# Altium PCB PCB_Automation System_3_2021-06-15.pcbdoc
Units mm, origin at the board's own origin, x right, y up, seen from the top; angles counter-clockwise.
Board outline 140.08 x 95.5 mm, 2 copper layers (Top Layer, Bottom Layer); 24 components, 25 nets, 101 pads, 10 vias.
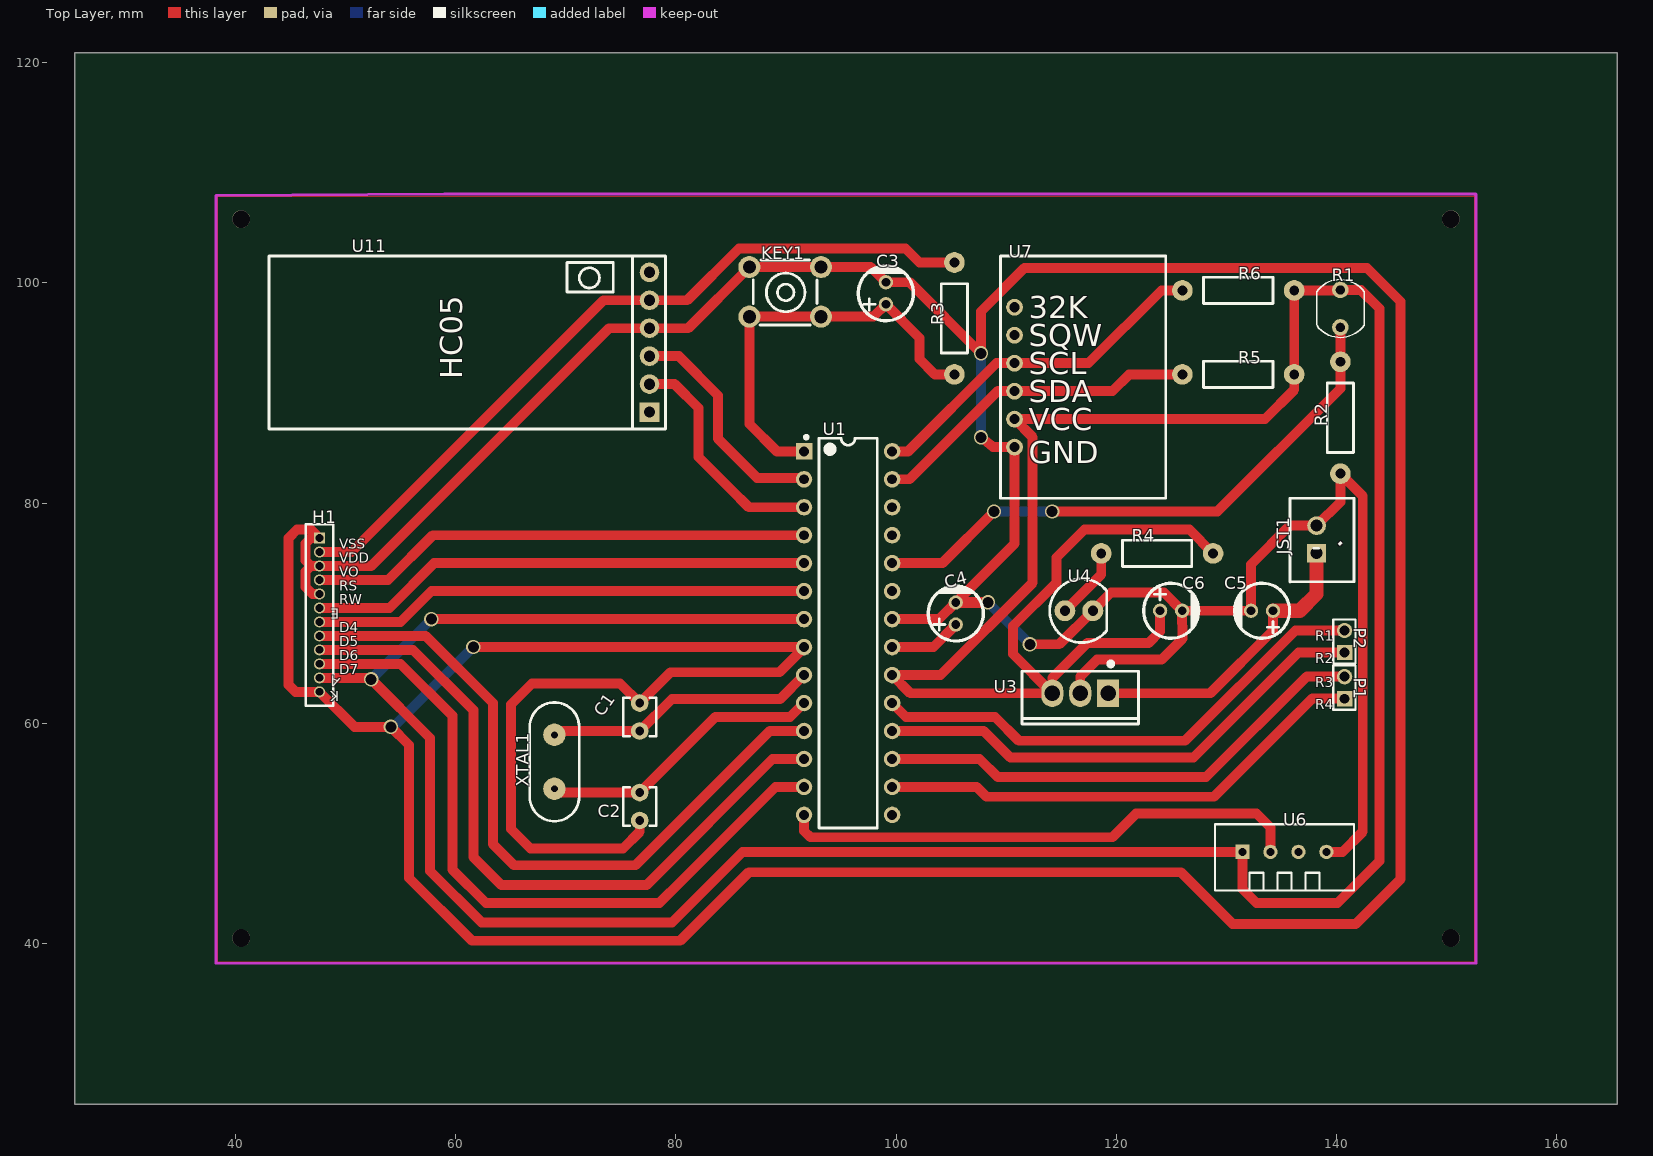
[diagram p0: Top Layer view]
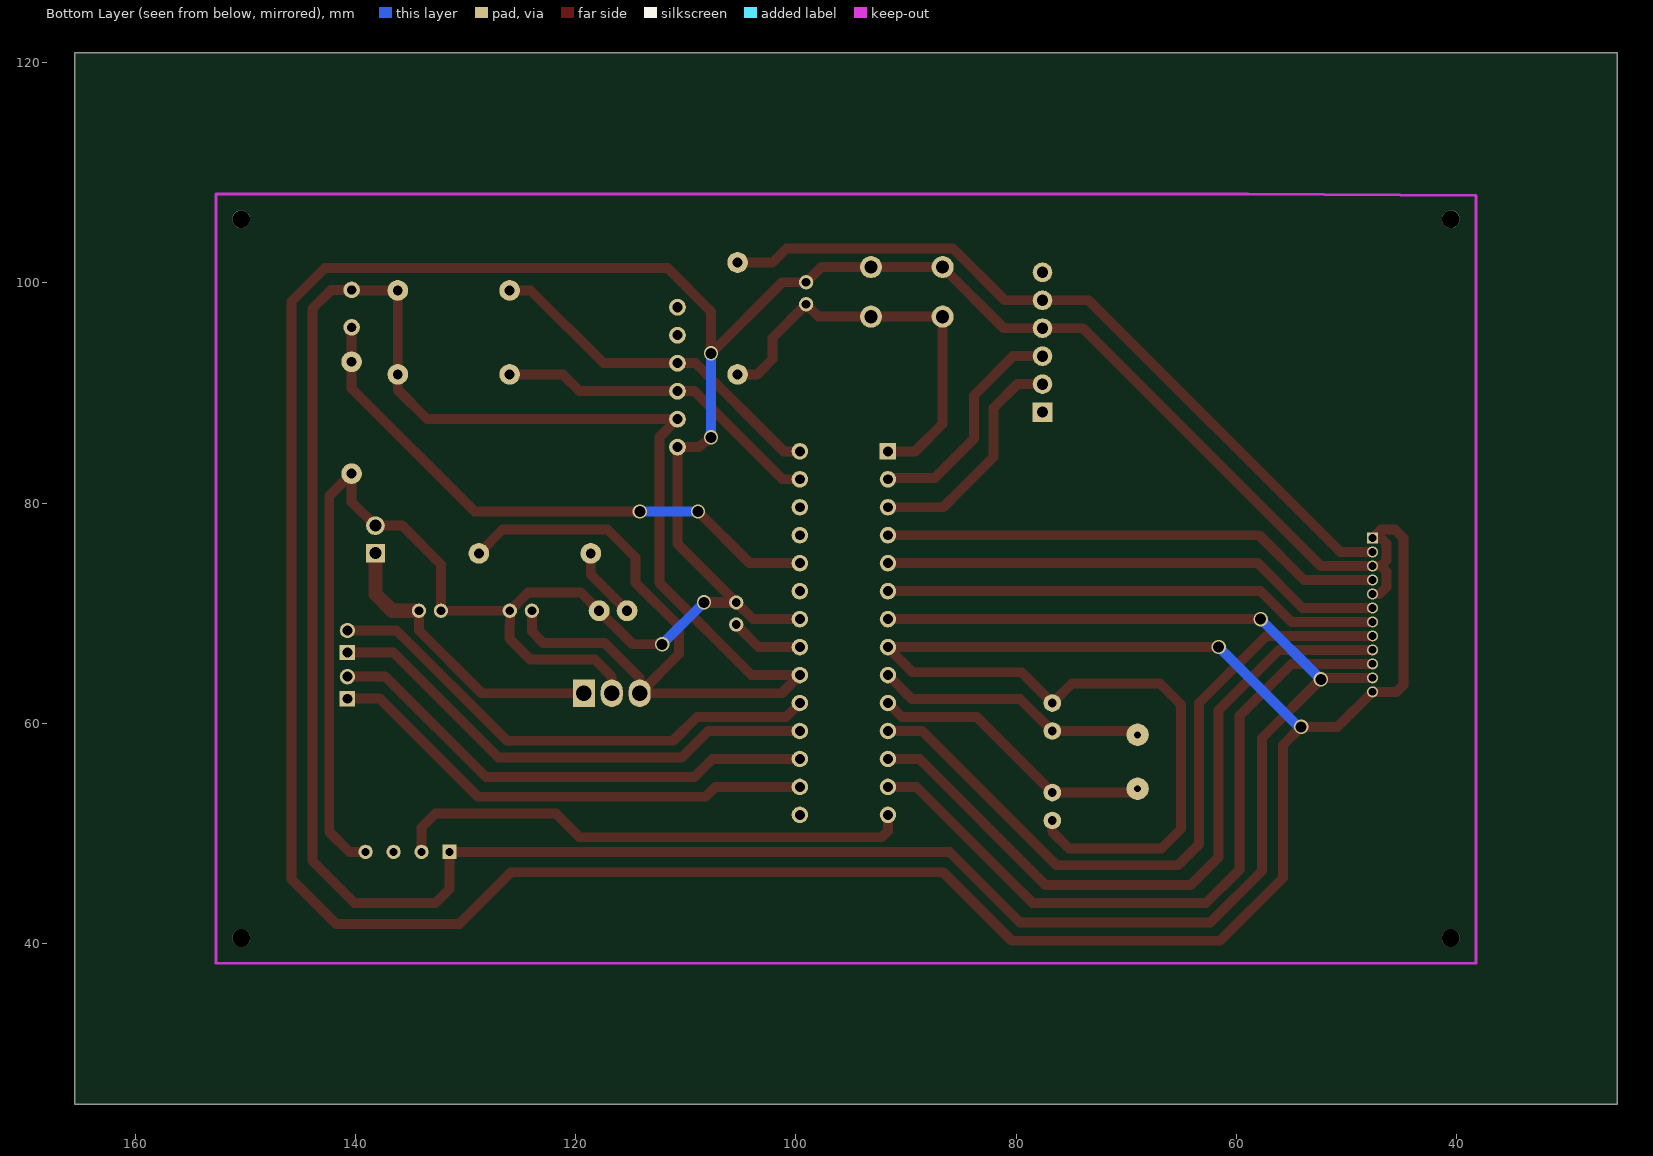
[diagram p1: Bottom Layer view, seen from below]

## Layer stack, top to bottom
Top Layer: signal copper (thickness not stored)
Dielectric: dielectric 0.32, FR-4, Dk 4.8
Bottom Layer: signal copper (thickness not stored)

## Board outline
165.481,25.4 25.4,25.4 25.4,120.904 165.481,120.904

## Components (designator, comment, footprint, x,y, rotation, side; value= is the part's Value field where it differs from the comment)
C1 "22pF" CAP-TH_L3.5-W3.0-P2.54-D0.8 76.708,60.579 r270 top
C2 "22pF" CAP-TH_L3.5-W3.0-P2.54-D0.8 76.708,52.451 r90 top
C3 "100nF" CAP-TH_BD5.0-P2.00-D0.8-FD 99.06,99.06 r90 top
C4 "100nF" CAP-TH_BD5.0-P2.00-D0.8-FD 105.41,69.977 r90 top
C5 "330nF" CAP-TH_BD5.0-P2.00-D0.8-FD 133.223,70.231 r180 top
C6 "100nF" CAP-TH_BD5.0-P2.00-D0.8-FD 124.968,70.231 r0 top
H1 "Female headers 1*12" HDR-TH_12P-P1.27-V 47.625,69.85 r270 top
JST1 "POWER" CONN-TH_XHB-2A 138.176,76.708 r270 top
KEY1 "RST_BTN" KEY-TH_4P-L6.0-W6.0-P4.50 89.916,99.187 r180 top
P1 "Female header1*2P" HDR-TH_2P-P2.00-V 140.716,63.246 r90 top
P2 "Female header1*2P" HDR-TH_2P-P2.00-V 140.716,67.437 r90 top
R1 "LDR07" RESISTOR_LDR_5.1X4.3_RM3.4 140.335,97.663 r270 top
R2 "10k" AXIAL-0.4 140.335,87.757 r90 top
R3 "10K" AXIAL-0.4 105.283,96.774 r90 top
R4 "330Ω" AXIAL-0.4 123.698,75.438 r180 top
R5 "10K" AXIAL-0.4 131.064,91.694 r0 top
R6 "10K" AXIAL-0.4 131.064,99.314 r0 top
U1 "ATMEGA _328P-PU" DIP-28_L34.6-W7.3-P2.54-LS10.2-BL 95.631,68.199 r270 top
U3 "7805_Regulator" TO-220-3_L10.0-W4.5-P2.54-L 116.713,62.738 r180 top
U4 "LED" "5MM LED" 115.316,70.231 r0 top
U6 "DHT11" SENSOR-TH_DHT11 135.255,48.133 r0 top
U7 "RTC_D3231" D3231 110.744,91.44 r90 top
U11 "HC05" HC05 77.597,88.265 r90 top
XTAL1 "16MHz" "16MHZ_OSC [PCB]" 68.961,56.515 r0 top

## Footprints (in the part's own frame and the unit in brackets; to place one, negate y for a bottom-side part, rotate by r counter-clockwise, add the part's x,y. Pads: shape width x height; smd on the part's side, far side on the other; paste and mask are expansions set on the pad)
"5MM LED" [mm]
  round 1.9 hole 0.914: 1(0,0) 2(2.54,0)
  silkscreen extent -1.37,-2.9 3.81,2.9
"16MHZ_OSC [PCB]" [mil]
  round 80 hole 25: 1(0,96.46) 2(0,-96.46)
  silkscreen extent -88,-212 88,212
AXIAL-0.4 [mil]
  round 74 hole 35.4: 1(-200,0) 2(200,0)
  silkscreen extent -124,-47 124,47
CAP-TH_BD5.0-P2.00-D0.8-FD [mm]
  round 1.3 hole 0.8: 1(-1,0) 2(1,0)
  silkscreen extent -2.5,-2.5 2.5,2.5
CAP-TH_L3.5-W3.0-P2.54-D0.8 [mm]
  round 1.6 hole 0.8: 1(-1.27,0) 2(1.27,0)
  silkscreen extent -1.75,-1.5 1.75,1.5
CONN-TH_XHB-2A [mm]
  rect 1.7x1.7 hole 1.1: 1(1.251,0)
  round 1.7 hole 1.1: 2(-1.251,0)
  silkscreen extent -3.75,-2.42 3.86,3.4
D3231 [mil]
  round 60 hole 36: 1(-249.92,-0.06) 2(-149.92,-0.06) 3(-49.92,-0.06) 4(50.08,-0.06) 5(150.08,-0.06) 6(250.08,-0.06)
  silkscreen extent -433,-541 433,50
DIP-28_L34.6-W7.3-P2.54-LS10.2-BL [mm]
  rect 1.5x1.5 hole 0.9: 1(-16.51,-4)
  round 1.5 hole 0.9: 2(-13.97,-4) 3(-11.43,-4) 4(-8.89,-4) 5(-6.35,-4) 6(-3.81,-4) 7(-1.27,-4) 8(1.27,-4) 9(3.81,-4) 10(6.35,-4) 11(8.89,-4) 12(11.43,-4) 13(13.97,-4) 14(16.51,-4) 15(16.51,4) 16(13.97,4) 17(11.43,4) 18(8.89,4) 19(6.35,4) 20(3.81,4) 21(1.27,4) 22(-1.27,4) 23(-3.81,4) 24(-6.35,4) 25(-8.89,4) 26(-11.43,4) 27(-13.97,4) 28(-16.51,4)
  silkscreen extent -17.94,-3.95 17.7,2.65
HC05 [mil]
  rect 70x70 hole 40: 1(0,0)
  round 70 hole 40: 2(100,0) 3(200,0) 4(300,0) 5(400,0) 6(500,0)
  silkscreen extent -60,-57 558,1360
HDR-TH_2P-P2.00-V [mm]
  rect 1.4x1.4 hole 0.889: 1(-1,0)
  round 1.4 hole 0.889: 2(1,0)
  silkscreen extent -2,-1 2.01,1.03
HDR-TH_12P-P1.27-V [mm]
  rect 1x1 hole 0.7: 1(-6.985,0)
  round 1 hole 0.7: 2(-5.715,0) 3(-4.445,0) 4(-3.175,0) 5(-1.905,0) 6(-0.635,0) 7(0.635,0) 8(1.905,0) 9(3.175,0) 10(4.445,0) 11(5.715,0) 12(6.985,0)
  silkscreen extent -8.24,-1.25 8.25,1.25
KEY-TH_4P-L6.0-W6.0-P4.50 [mm]
  round 2 hole 1.2: 1(-3.25,-2.25) 2(3.25,-2.25) 3(3.25,2.25) 4(-3.25,2.25)
  silkscreen extent -2.9,-2.9 2.9,3
RESISTOR_LDR_5.1X4.3_RM3.4 [mm]
  round 1.5 hole 0.8 slot 0.805 at 0 deg: 1(-1.7,0) 2(1.701,0)
  silkscreen extent -2.65,-2.15 2.62,2.17
SENSOR-TH_DHT11 [mil]
  rect 51x51 hole 28: 1(-150,7.89)
  round 51 hole 28: 2(-50,7.89) 3(50,7.89) 4(150,7.89)
  silkscreen extent -248,-130 248,106
TO-220-3_L10.0-W4.5-P2.54-L [mm]
  rect 2x2.5 hole 1.4: 1(-2.54,0)
  oval 2x2.5 hole 1.4: 2(0,0) 3(2.54,0)
  silkscreen extent -5.3,-2.86 5.3,2.8

## Free pads (board coordinates)
  round 1.6 hole 1.6: 1(150.368,105.791) 2(150.368,40.513) 3(40.513,40.513) 4(40.513,105.791)

## Via types
v1: diameter 1.3, hole 1, Top Layer to Bottom Layer, 10 vias

## Nets (pads, with @x,y where several pads share a name; then routed paths per layer and width w, separated by ;. In a path a pad name is that pad's centre, name@x,y a point inside that pad or via, vN(x,y) a via of type N, cw(c..) or ccw(c..) an arc to the next point about the centre after c; other vN are vias at no path point)
+5V: C6.1 H1.2 H1.11 R1.1 R3.2 R4.1 R5.2 R6.2 U1.7 U1.20 U3.3 U6.1 U7.2 U11.5 | length 419.5
  Top Layer w0.9: H1.11 52.324,64.135 v1(52.324,64.008) 57.658,58.674 57.658,46.609 62.357,41.91 79.629,41.91 86.053,48.334 U6.1 131.445,44.958 132.715,43.688 140.081,43.688 143.891,47.498 143.891,97.663 142.192,99.362 R1.1 ; H1.2 50.546,75.565 73.406,98.425 U11.5 81.026,98.425 85.725,103.124 100.838,103.124 102.108,101.854 R3.2 ; v1(57.785,69.469) 76.698,69.469 U1.7 ; U7.2 133.479,87.632 136.144,90.297 R5.2 R6.2 140.335,99.314 R1.1 ; U7.2 112.395,85.982 112.395,72.771 104.013,64.389 U1.20 101.282,62.738 U3.3 ; C6.1 123.967,68.341 122.936,67.31 117.348,67.31 114.173,64.135 U3.3 ; R4.1 126.619,77.597 117.094,77.597 114.554,75.057 114.554,72.771 110.617,68.834 110.617,66.294 U3.3
  Bottom Layer w0.9: v1(52.324,64.008) v1(57.785,69.469)
D4: H1.7 U1.6 | length 45.2
  Top Layer w0.9: H1.7 54.991,69.215 57.785,72.009 77.432,72.009 U1.6
D5: H1.8 U1.11 | length 65.2
  Top Layer w0.9: H1.8 57.277,67.945 63.373,61.849 63.373,49.022 65.278,47.117 70.693,47.117 76.327,47.117 88.519,59.309 U1.11
D6: H1.9 U1.12 | length 65.4
  Top Layer w0.9: H1.9 56.134,66.675 61.595,61.214 61.595,47.879 64.135,45.339 72.156,45.339 77.343,45.339 88.773,56.769 U1.12
D7: H1.10 U1.13 | length 65.6
  Top Layer w0.9: H1.10 54.991,65.405 59.69,60.706 59.69,46.736 62.738,43.688 78.486,43.688 80.546,45.748 89.027,54.229 U1.13
DATA: U1.14 U6.2 | length 47.7
  Top Layer w0.9: U1.14 91.63,50.228 92.202,49.657 119.634,49.657 121.793,51.816 132.715,51.816 133.985,50.546 U6.2
ENABLE: H1.6 U1.5 | length 45.7
  Top Layer w0.9: H1.6 53.975,70.485 58.039,74.549 U1.5
GND: C1.1 C2.1 C3.2 C4.2 C5.2 C6.2 H1.1 H1.3 H1.5 H1.12 JST1.2 KEY1.1 KEY1.2 R2.1 U1.8 U1.22 U3.2 U4.2 U6.4 U7.1 U11.4 | length 551.6
  Top Layer w0.9: H1.5 46.99,71.755 46.355,72.39 46.355,73.787 46.863,74.295 ; v1(61.595,66.929) 76.154,66.929 81.11,66.929 U1.8 91.63,66.865 89.408,64.643 86.444,64.643 79.502,64.643 C1.1 74.93,63.627 66.929,63.627 65.024,61.722 65.024,50.419 66.802,48.641 74.503,48.641 75.184,48.641 76.708,50.165 C2.1 ; C3.2 97.683,101.437 KEY1.1 KEY1.2 81.114,95.885 U11.4 73.914,95.885 63.231,85.202 52.324,74.295 H1.3 ; C3.2 101.234,100.061 v1(107.696,93.599) 107.696,97.409 111.633,101.346 142.748,101.346 145.796,98.298 145.796,45.847 141.732,41.783 130.556,41.783 125.857,46.482 86.614,46.482 80.391,40.259 61.468,40.259 55.753,45.974 55.753,58.039 v1(54.102,59.69) 52.299,59.69 50.8,59.69 H1.12 45.466,62.865 44.831,63.5 44.831,76.835 45.593,77.597 46.863,77.597 H1.1 46.863,76.835 46.355,76.327 46.355,74.803 46.863,74.295 ; U1.22 103.901,69.469 C4.2 110.747,76.312 U7.1 108.806,85.093 v1(107.696,85.979) ; v1(112.141,67.183) 114.808,67.183 U4.2 119.507,71.882 124.318,71.882 C6.2 125.984,67.691 124.079,65.786 118.237,65.786 116.713,64.262 U3.2 ; C6.2 C5.2 ; C5.2 132.222,74.437 135.743,77.96 JST1.2@138.176,77.96 ; JST1.2 140.335,80.118 R2.1 142.367,80.645 142.367,50.165 140.535,48.333 U6.4 ; 46.863,74.295 H1.3 ; 46.863,74.295 H1.3
  Top Layer w1: C4.2 v1(108.331,70.993)
  Bottom Layer w0.9: v1(54.102,59.69) 54.356,59.69 v1(61.595,66.929) ; v1(107.696,85.979) v1(107.696,93.599) ; v1(108.331,70.993) v1(112.141,67.183)
RELAY1: P1.1 U1.16 | length 45.1
  Top Layer w0.9: U1.16 107.315,54.229 108.204,53.34 128.872,53.34 137.78,62.245 P1.1
RELAY2: P1.2 U1.17 | length 45.6
  Top Layer w0.9: U1.17 107.569,56.769 109.22,55.118 128.143,55.118 137.287,64.262 P1.2
RELAY3: P2.1 U1.18 | length 46
  Top Layer w0.9: U1.18 107.95,59.309 110.363,56.896 127,56.896 136.54,66.436 P2.1
RELAY4: P2.2 U1.19 | length 46.7
  Top Layer w0.9: U1.19 100.901,60.579 108.966,60.579 111.125,58.42 126.238,58.42 136.256,68.438 P2.2
RS: H1.4 U1.4 | length 45.7
  Top Layer w0.9: H1.4 53.848,73.025 57.912,77.089 69.113,77.089 U1.4
RX: U1.3 U11.2 | length 21.3
  Top Layer w0.9: U11.2 79.883,90.805 82.042,88.646 82.042,84.201 84.945,81.298 86.614,79.629 U1.3
S$68: 
SCL: R6.1 U1.28 U7.4 | length 32.4
  Top Layer w0.9: U1.28 101.092,84.709 109.096,92.713 U7.4 117.478,92.713 124.079,99.314 R6.1
SDA: R5.1 U1.27 U7.3 | length 30.3
  Top Layer w0.9: U1.27 101.219,82.169 109.223,90.173 U7.3 ; U7.3 119.636,90.172 121.158,91.694 R5.1
TX: U1.2 U11.3 | length 21
  Top Layer w0.9: U11.3 80.264,93.345 83.82,89.789 83.82,85.852 87.376,82.296 91.504,82.296 U1.2
U1_1: C3.1 KEY1.3 KEY1.4 R3.1 U1.1 | length 38.6
  Top Layer w0.9: KEY1.3 KEY1.4 97.937,96.937 C3.1 ; KEY1.3@86.667,96.937 86.667,91.082 86.667,87.196 89.154,84.709 U1.1 ; C3.1 102.108,94.996 102.108,93.091 103.505,91.694 R3.1
U1_9: C1.2 U1.9 XTAL1.1 | length 24.9
  Top Layer w0.9: XTAL1.1 69.305,59.309 C1.2 79.629,62.23 86.063,62.23 89.471,62.23 U1.9
U1_10: C2.2 U1.10 XTAL1.2 | length 26.2
  Top Layer w0.9: XTAL1.2 69.305,53.721 C2.2 83.566,60.579 86.063,60.579 90.361,60.579 U1.10
U1_21: C4.1 U1.21 | length 6.6
  Top Layer w0.9: U1.21 103.378,66.929 105.41,68.961 C4.1
U1_24: R1.2 R2.2 U1.24 | length 52.8
  Top Layer w0.9: U1.24 104.187,74.549 v1(108.886,79.248) ; v1(114.169,79.248) 129.159,79.248 140.335,90.424 R2.2 R1.2@140.335,95.963
  Bottom Layer w0.9: v1(108.886,79.248) v1(114.169,79.248)
U4_1: R4.2 U4.1 | length 6.6
  Top Layer w0.9: U4.1 118.618,73.533 R4.2
VCC: C5.1 JST1.1 U3.1 | length 27.4
  Top Layer w0.9: U3.1 128.524,62.738 134.224,68.438 C5.1
  Top Layer w1.3: C5.1 136.652,70.231 138.176,71.755 JST1.1@138.176,75.456
pads on no net: U1.15 U1.23 U1.25 U1.26 U6.3 U7.5 U7.6 U11.1 U11.6

## Polygon pours and split planes (outlines as drawn)
GND on Top Layer (solid): 38.354,38.354 152.527,38.354 152.527,107.95 152.4,107.823 38.354,107.823

## Silkscreen, mask and mechanical layers (free items; w line width, h text height)
Top Overlay:
  text "VSS" at 49.403,75.877 h0.9
  text "VDD" at 49.403,74.607 h0.9
  text "VO" at 49.403,73.337 h0.9
  text "RS" at 49.403,72.067 h0.9
  text "RW" at 49.403,70.797 h0.9
  text "E" at 49.403,70.427 h0.9 r180
  text "D4" at 49.403,68.257 h0.9
  text "R1" at 138.049,67.495 h0.9
  text "D5" at 49.403,66.987 h0.9
  text "D6" at 49.403,65.717 h0.9
  text "R2" at 138.049,65.463 h0.9
  text "D7" at 49.403,64.447 h0.9
  text "A" at 49.564,64.047 h0.9 r159
  text "R3" at 138.049,63.304 h0.9
  text "K" at 49.403,62.934 h0.9 r180
  text "R4" at 138.049,61.272 h0.9

## Text inside footprints (layer, text, board x,y; h text height)
U7: Top Overlay "GND" at 112.014,83.635 h2.03; Top Overlay "VCC" at 112.014,86.614 h2.03; Top Overlay "SDA" at 112.014,89.154 h2.03; Top Overlay "SCL" at 112.014,91.694 h2.03; Top Overlay "SQW" at 112.014,94.234 h2.03; Top Overlay "32K" at 112.014,96.774 h2.03